# Altium PCB SML-230109PCB2.PcbDoc
Units mm, origin at the board's own origin, x right, y up, seen from the top; angles counter-clockwise.
Board outline 55 x 75 mm, 2 copper layers (Top Layer, Bottom Layer), stack 1.56 mm thick; 29 components, 21 nets, 98 pads, 190 vias.
Unrouted connection lines stored in the file: 175.
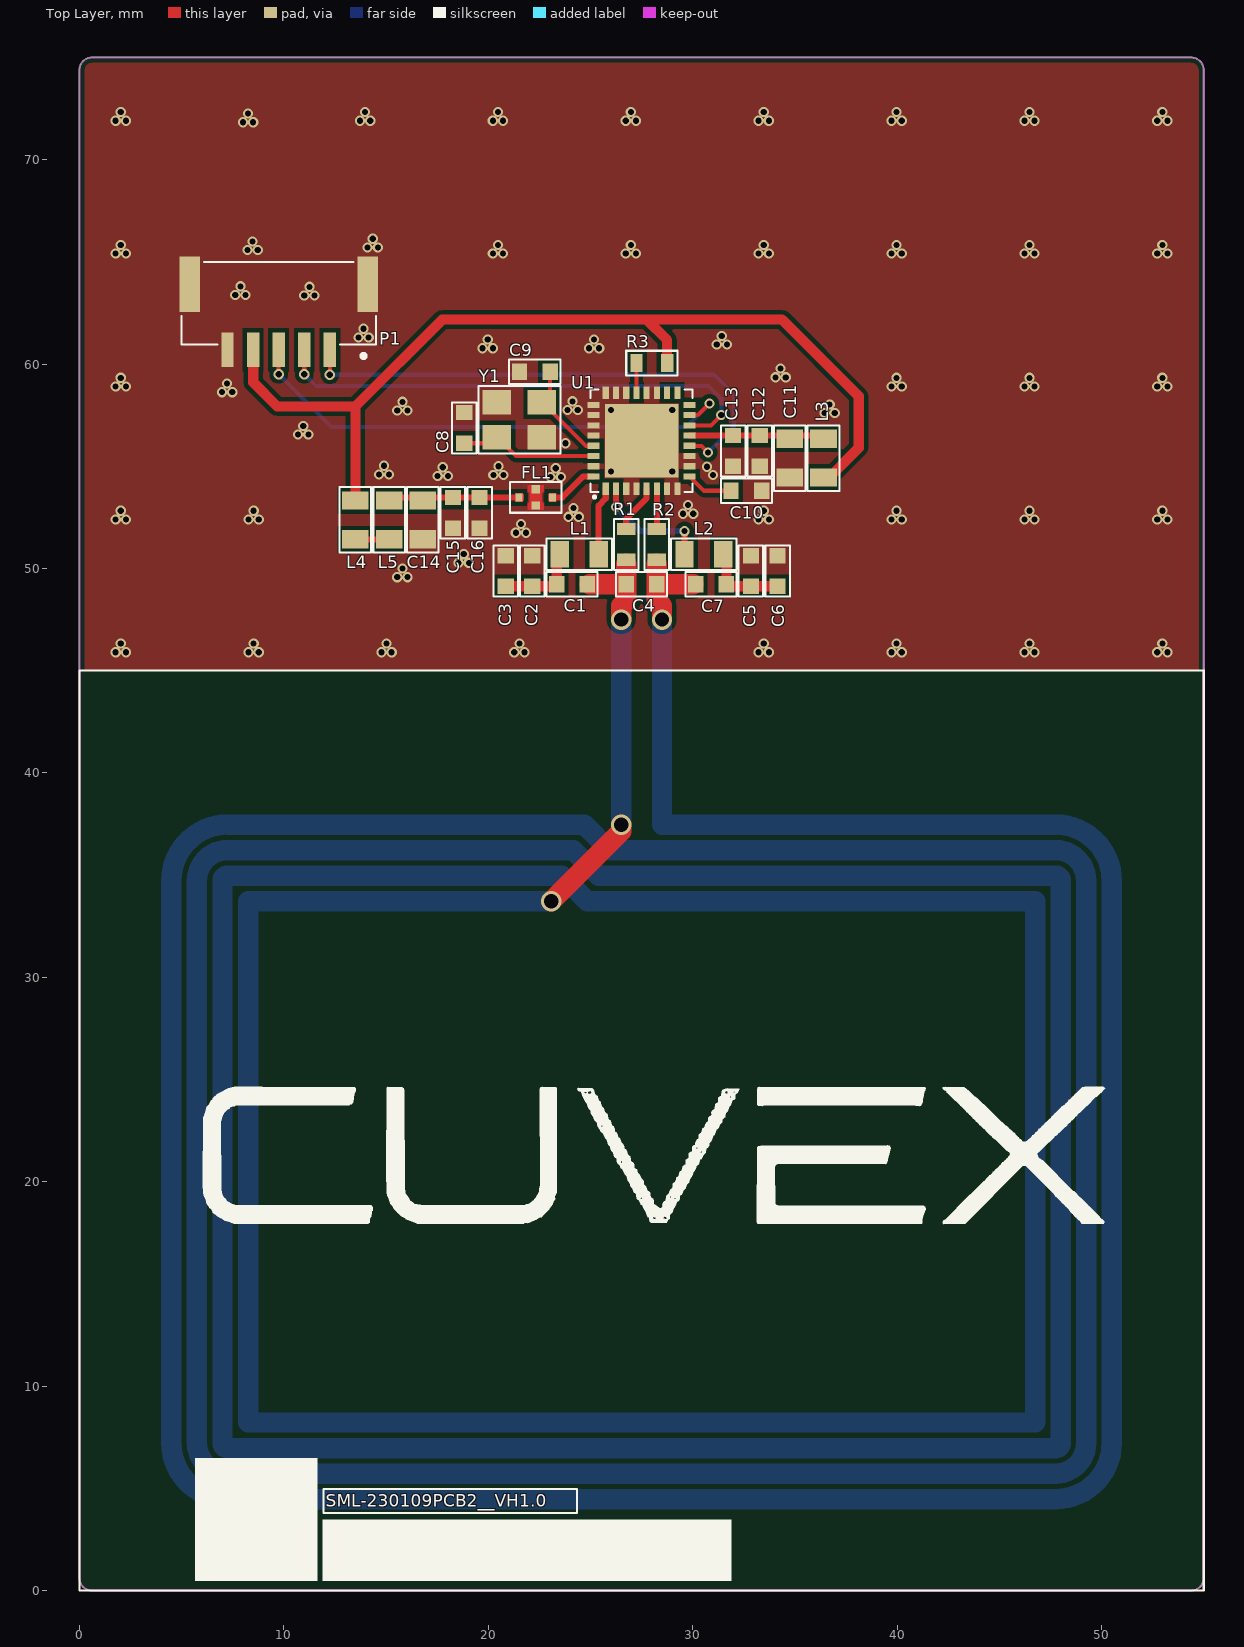
[diagram p0: Top Layer view]
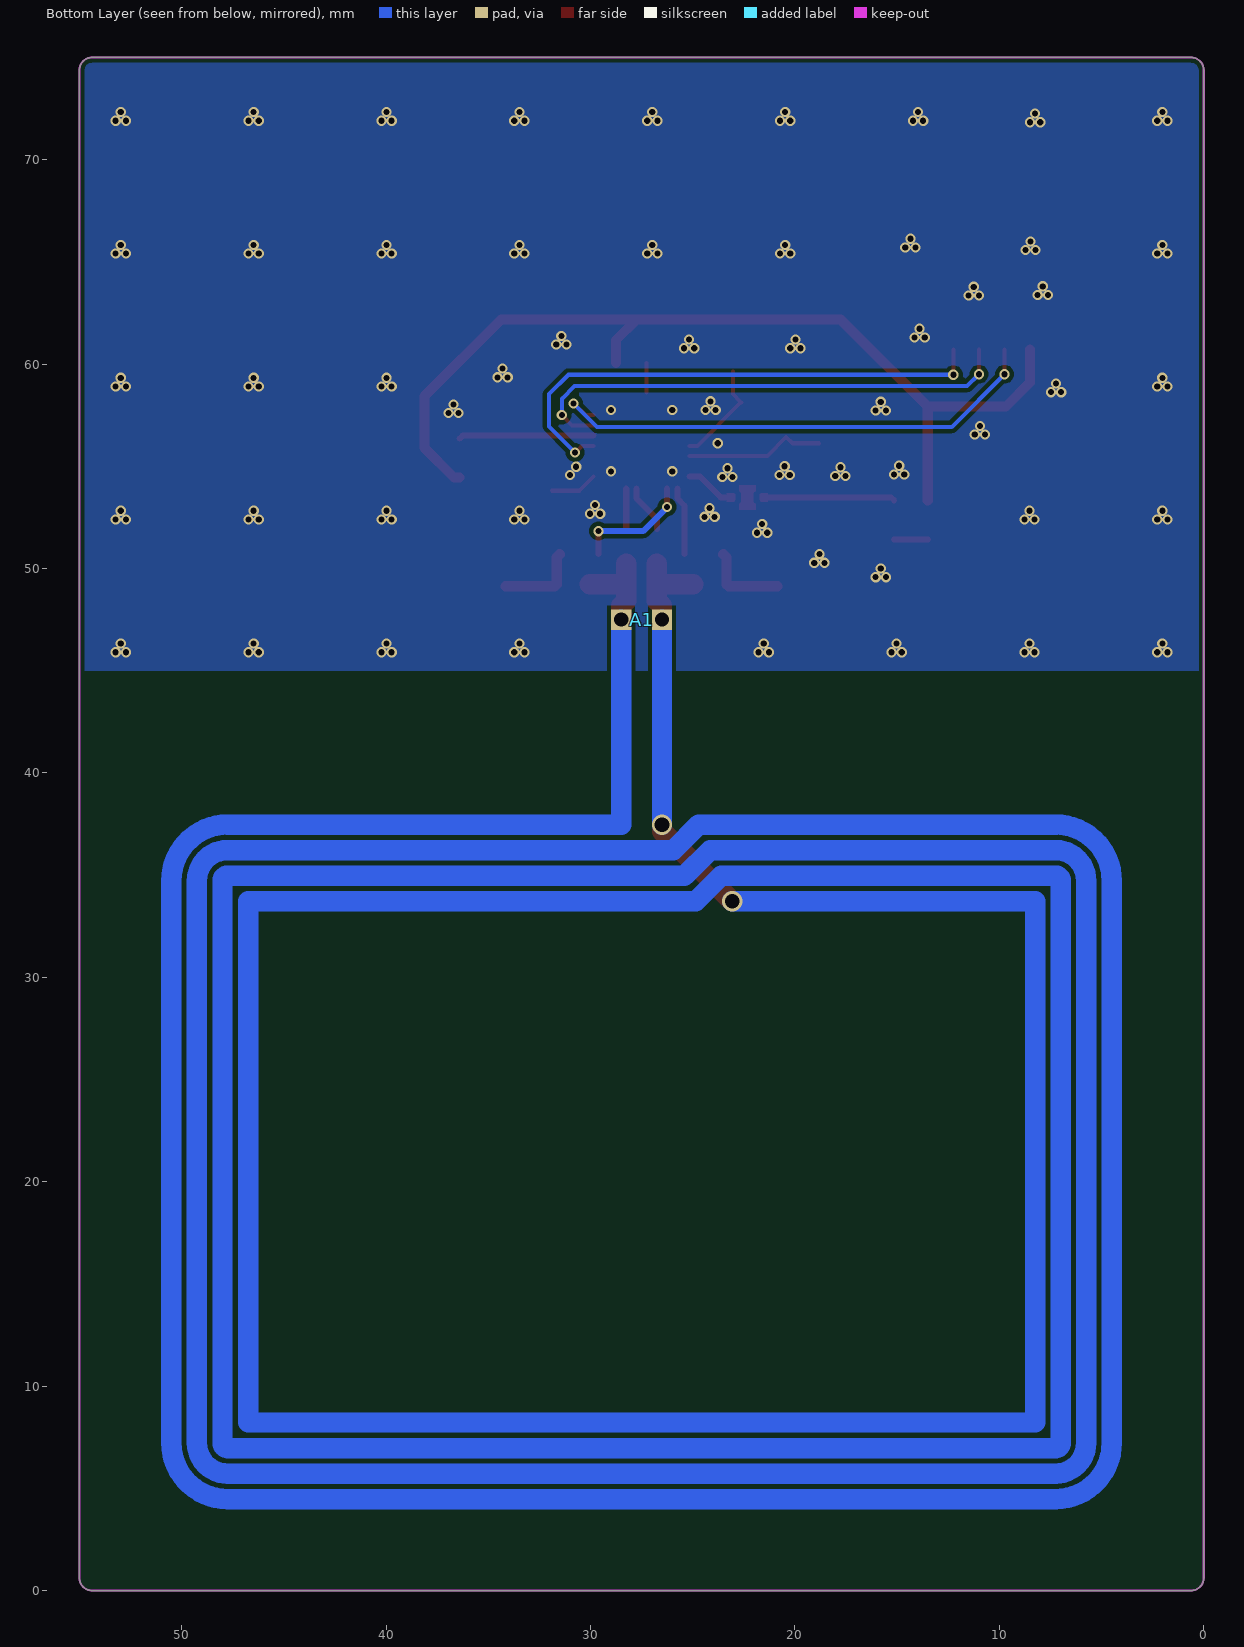
[diagram p1: Bottom Layer view, seen from below]
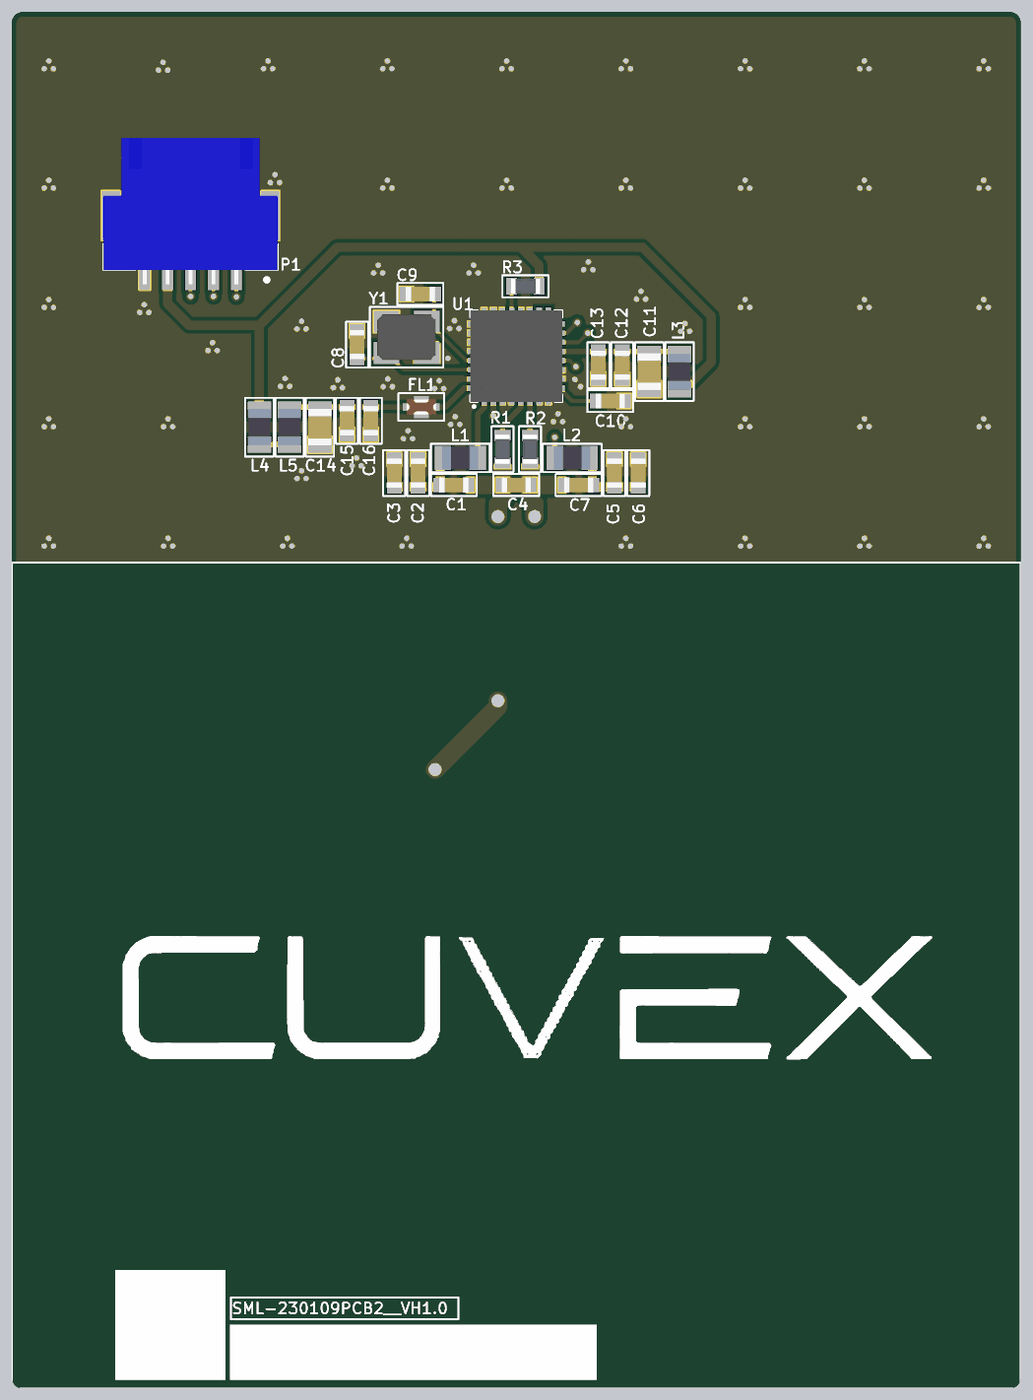
[diagram p2: 3D render of the assembled board from above, using the file's embedded part models]

## Layer stack, top to bottom
Top Solder: solder mask 0.02, SM-001, Dk 4
Top Layer: signal copper 0.035
Dielectric 1: core 1.49, Core-043, Dk 4.3
Bottom Layer: signal copper 0.035
Bottom Solder: solder mask 0.02, SM-001, Dk 4

## Board outline
0,0.625 0,74.375 cw(c0.625,74.375) 0.625,75 54.375,75 cw(c54.375,74.375) 55,74.375 55,0.625 cw(c54.375,0.625) 54.375,0 0.625,0 cw(c0.625,0.625)

## Design rules (kind name [scope] priority, off if disabled: settings)
Clearance [All] p1: gap=0.2 ignorepadtopadclearanceinfootprint=FALSE except(0: Arc-Hole Track-Hole SMDPad-Hole THPad-Hole Via-Hole Fill-Hole Poly-Hole Region-Hole Text-Hole)
ComponentClearance [All] p1: gap=0.05 collisioncheckmode=3 verticalgap=0.01 showdistances=FALSE
HoleToHoleClearance [All] p1: gap=0.15 allowstackedmicrovias=TRUE
MinimumSolderMaskSliver [All] p1: minsoldermaskwidth=0.04
PlaneClearance [All] p1: clearance=0.2
PlaneConnect [All] p1: planeconnectstyle=Direct reliefexpansion=0.508 reliefentries=4 reliefconductorwidth=0.254 reliefairgap=0.254
PolygonConnect [All] p1: connectstyle=Direct reliefconductorwidth=0.254 reliefentries=4 polygonreliefangle="90 Angle" airgapwidth=0.254
RoutingVias [All] p1: holewidth=0.3 width=0.5 viastyle="Through Hole" minholewidth=0.3 minwidth=0.5 maxholewidth=1 maxwidth=1.5
SilkToSilkClearance [All] p1: silktosilkclearance=0
SilkToSolderMaskClearance [IsPad] p1: minsilkscreentomaskgap=0.05 clearancetoexposedcopper=TRUE
SolderMaskExpansion [All] p1: expansion=0.102 istentingtop=FALSE
Width [All] p1: maxlimit=1 minlimit=0.2 preferedwidth=0.2
23 further rules are at their usual default settings.

## Components (designator, comment, footprint, x,y, rotation, side; value= is the part's Value field where it differs from the comment)
A1 "." ANT-PCB__NFC-MODEL-1 27.5,47.502 r180 bottom locked net-tie
C1 "." "[G] CAP-MLCC__0603" 24.1,49.225 r0 top locked value=47pF
C2 "." "[G] CAP-MLCC__0603" 22.15,49.875 r270 top locked value=100pF
C3 "." "[G] CAP-MLCC__0603" 20.85,49.875 r270 top locked value=100pF
C4 "." "[G] CAP-MLCC__0603" 27.5,49.227 r180 top locked value=82pF
C5 "." "[G] CAP-MLCC__0603" 32.85,49.875 r90 top locked value=100pF
C6 "." "[G] CAP-MLCC__0603" 34.15,49.875 r90 top locked value=100pF
C7 "." "[G] CAP-MLCC__0603" 30.9,49.225 r180 top locked value=47pF
C8 "." "[G] CAP-MLCC__0603" 18.825,56.875 r90 top locked value=10pF
C9 "." "[G] CAP-MLCC__0603" 22.275,59.625 r180 top locked value=10pF
C10 "." "[G] CAP-MLCC__0603" 32.625,53.8 r0 top locked value=1nF
C11 "." "[G] CAP-MLCC__0805" 34.75,55.4 r90 top locked value=1uF
C12 "." "[G] CAP-MLCC__0603" 33.275,55.75 r90 top locked value=100nF
C13 "." "[G] CAP-MLCC__0603" 31.975,55.75 r90 top locked value=10nF
C14 "." "[G] CAP-MLCC__0805" 16.8,52.375 r90 top locked value=1uF
C15 "." "[G] CAP-MLCC__0603" 18.275,52.725 r90 top locked value=100nF
C16 "." "[G] CAP-MLCC__0603" 19.575,52.725 r90 top locked value=10nF
FL1 "." EMIFIL-0603__NFM18PS 22.325,53.475 r0 top locked value=1uF
L1 "." "[G] IND__0805" 24.45,50.7 r180 top locked value=560nH
L2 "." "[G] IND__0805" 30.55,50.7 r0 top locked value=560nH
L3 "." "[G] IND__0805" 36.4,55.4 r90 top locked
L4 "." "[G] IND__0805" 13.5,52.375 r270 top locked
L5 "." "[G] IND__0805" 15.15,52.375 r90 top locked
P1 "." CONN-SMD__JST(5PIN)__SM05B-GHS-TB(LF)(SN) 9.75,62.3 r180 top locked
R1 "." "[G] RES-CHIP__0603" 26.75,51.175 r270 top locked value=330R
R2 "." "[G] RES-CHIP__0603" 28.25,51.175 r270 top locked value=330R
R3 "." "[G] RES-CHIP__0603" 28,60.05 r180 top locked value=10K
U1 "CR95HF-VMD5T" IC-NFC-RDR/WTR__CR95HF__VFQFPN32 27.5,56.25 r90 top locked
Y1 "." CRYSTAL__ABM8G 26.175,57.375 r0 top locked value="27.12 MHz"

## Footprints (in the part's own frame and the unit in brackets; to place one, negate y for a bottom-side part, rotate by r counter-clockwise, add the part's x,y. Pads: shape width x height; smd on the part's side, far side on the other; paste and mask are expansions set on the pad)
"[G] CAP-MLCC__0603" [mm] "Chip Capacitor, 2-Leads, Body 1.60x0.80mm"
  rect 0.75x0.8 smd mask+0.06: 1(-0.75,0) 2(0.75,0)
  silkscreen extent -1.25,-0.6 1.25,0.6, body extent -0.8,-0.41 0.8,0.41, height 0.82
"[G] CAP-MLCC__0805" [mm] "Chip Capacitor, 2-Leads, Body 2.00x1.25mm"
  rect 0.9x1.3 smd mask+0.06: 1(-0.95,0) 2(0.95,0)
  silkscreen extent -1.6,-0.77 1.6,0.77, body extent -1,-0.64 1,0.64, height 1.26
"[G] IND__0805" [mm] "Inductor, Body 2.00x1.25mm"
  rect 0.9x1.3 smd mask+0.06: 1(-0.95,0) 2(0.95,0)
  silkscreen extent -1.6,-0.77 1.6,0.78, body extent -1,-0.62 1,0.63, height 0.85
"[G] RES-CHIP__0603" [mm] "Chip Resistor, 2-Leads, Body 1.60x0.80mm"
  rect 0.6x0.9 smd mask+0.06: 1(-0.75,0) 2(0.75,0)
  silkscreen extent -1.25,-0.6 1.25,0.6, body extent -0.8,-0.4 0.8,0.4, height 0.45
ANT-PCB__NFC-MODEL-1 [mm] "Custom pcb antenna, NFC"
  rect 1x1 smd paste-99 mask+0.102: 1(-1,0) 2(1,0)
  Top Layer lines w1: 4.425,-13.778 19.25,-13.778 19.25,-39.278 -19.25,-39.278 -19.25,-13.778 2.65,-13.778 3.9,-12.528 20.25,-12.528 cw(c20.25,-12.778) 20.5,-12.778 20.5,-40.278 cw(c20.25,-40.278) 20.25,-40.528 -20.25,-40.528 cw(c-20.25,-40.278) -20.5,-40.278 -20.5,-12.778 cw(c-20.25,-12.778) -20.25,-12.528 2.1,-12.528 3.35,-11.278 20.25,-11.278 cw(c20.25,-12.778) 21.75,-12.778 21.75,-40.278 cw(c20.25,-40.278) 20.25,-41.778 -20.25,-41.778 cw(c-20.25,-40.278) -21.75,-40.278 -21.75,-12.778 cw(c-20.25,-12.778) -20.25,-11.278 1.55,-11.278 2.8,-10.028 20.25,-10.028 cw(c20.25,-12.778) 23,-12.778 23,-40.278 cw(c20.25,-40.278) 20.25,-43.028 -20.25,-43.028 cw(c-20.25,-40.278) -23,-40.278 -23,-12.778 cw(c-20.25,-12.778) -20.25,-10.028 -1,-10.028 -1,0 ; 1,-10.028 1,0
  Bottom Layer lines w1: 4.425,-13.778 1,-10.353 1,-10.028
CONN-SMD__JST(5PIN)__SM05B-GHS-TB(LF)(SN) [mm] "JST, 1x5 pin, side entry, matching connector \"GHR-05V-S\""
  rect 1x2.7 smd mask+0.06: 0(-4.35,-1.6) 0(4.35,-1.6)
  rect 0.6x1.7 smd mask+0.06: 1(-2.5,1.6) 2(-1.25,1.6) 3(0,1.6) 4(1.25,1.6) 5(2.5,1.6)
  silkscreen extent -4.75,-2.7 4.75,2, body extent -4.75,-5.82 4.75,2.15, height 4.35
CRYSTAL__ABM8G [mm] "SMD, 4-Leads, Body 3.2x2.5mm"
  rect 1.4x1.2 smd mask+0.06: 1(-5.75,-0.95) 2(-3.55,-0.95) 3(-3.55,0.75) 4(-5.75,0.75)
  silkscreen extent -6.65,-1.75 -2.65,1.55, body extent -6.25,-1.34 -3.05,1.14, height 0.99
EMIFIL-0603__NFM18PS [mm]
  rect 0.4x0.4 smd paste-1 mask+0: 0(0,-0.4) 0(0,0.4)
  rect 0.35x0.4 smd paste-1 mask+0: 1(-0.825,0) 2(0.825,0)
  Top Layer region: 0.3,-0.2 -0.3,-0.2 -0.3,0.2 0.3,0.2
  Top Layer region: 0.4,-0.3 0.4,-0.6 -0.4,-0.6 -0.4,-0.3 -0.3,-0.2 0.3,-0.2
  Top Layer region: 0.4,0.3 0.3,0.2 -0.3,0.2 -0.4,0.3 -0.4,0.6 0.4,0.6
  Top Layer region: 1,-0.2 0.65,-0.2 0.6,-0.15 0.6,0.15 0.65,0.2 1,0.2
  Top Layer region: -0.6,0.15 -0.6,-0.15 -0.65,-0.2 -1,-0.2 -1,0.2 -0.65,0.2
  silkscreen extent -1.25,-0.75 1.25,0.75, body extent -0.8,-0.4 0.8,0.4, height 0.7
IC-NFC-RDR/WTR__CR95HF__VFQFPN32 [mm]
  rect 3.6x3.6 smd paste-0.5 mask+0.06: 0(0,0)
  rect 0.6x0.3 smd mask+0.06: 1(-2.35,1.75) 2(-2.35,1.25) 3(-2.35,0.75) 4(-2.35,0.25) 5(-2.35,-0.25) 6(-2.35,-0.75) 7(-2.35,-1.25) 8(-2.35,-1.75) 17(2.35,-1.75) 18(2.35,-1.25) 19(2.35,-0.75) 20(2.35,-0.25) 21(2.35,0.25) 22(2.35,0.75) 23(2.35,1.25) 24(2.35,1.75)
  rect 0.3x0.6 smd mask+0.06: 9(-1.75,-2.35) 10(-1.25,-2.35) 11(-0.75,-2.35) 12(-0.25,-2.35) 13(0.25,-2.35) 14(0.75,-2.35) 15(1.25,-2.35) 16(1.75,-2.35) 25(1.75,2.35) 26(1.25,2.35) 27(0.75,2.35) 28(0.25,2.35) 29(-0.25,2.35) 30(-0.75,2.35) 31(-1.25,2.35) 32(-1.75,2.35)
  silkscreen extent -2.77,-2.5 2.5,2.5, body extent -2.5,-2.5 2.5,2.5, height 0.92

## Part data
A1: library part ANT-PCB__NFC-MODEL-1, "ANTENNA PCB, NFC, model 1", [06] - Package=55x45mm, [00] - Description (BOM)="ANTENNA PCB, NFC, model 1"
C1 C2 C3 C4 C5 C6 C7 C8 C9 C10 C12 C13 C15 C16: library part CAP_MLCC_0603, "CAP MLCC 0603", [04] - Power features=010, [06] - Package=0603, Voltage=010
  C1 C7: [00] - Description (BOM)="CAP MLCC 47pF 0603 010", STAR Code=C47pF0603010
  C2 C3 C5 C6: [00] - Description (BOM)="CAP MLCC 100pF 0603 010", STAR Code=C100pF0603010
  C4: [00] - Description (BOM)="CAP MLCC 82pF 0603 010", STAR Code=C82pF0603010
  C8 C9: [00] - Description (BOM)="CAP MLCC 10pF 0603 010", STAR Code=C10pF0603010
  C10: [00] - Description (BOM)="CAP MLCC 1nF 0603 010", STAR Code=C1nF0603010
  C12 C15: [00] - Description (BOM)="CAP MLCC 100nF 0603 010", STAR Code=C100nF0603010
  C13 C16: [00] - Description (BOM)="CAP MLCC 10nF 0603 010", STAR Code=C10nF0603010
C11 C14: library part CAP_MLCC_0805, "CAP MLCC 0805", [04] - Power features=010, [06] - Package=0805, [00] - Description (BOM)="CAP MLCC 1uF 0805 010", STAR Code=C1uF0805010, Voltage=010
FL1: library part NFM18PS105R0J3D, "EMIFIL 0603, Murata, NFM18PS, 1uF, 6'3V, 2A", [02] - Manufacturer=Murata, [04] - Power features="6'3V, 2A", [05] - Temperature range="-55 to +105 ºC", [06] - Package="NFM18PS (0603)", [00] - Description (BOM)="EMIFIL 0603, Murata, NFM18PS, 1uF, 6'3V, 2A", [01] - MPN Code=NFM18PS105R0J3D, [03] - Datasheet=https://www.mouser.es/datasheet/2/281/1/NFM18PS105R0J3_01-1989791.pdf
L1 L2: library part IND_SMD_0805, "IND SMD 0805 [G]", [01] - MPN Code=LQM21NNR56K10D, [06] - Package=0805, [00] - Description (BOM)="IND 560nH 0805"
L3 L4: library part IND_SMD_0805, "IND SMD 0805 [G]", [01] - MPN Code=742792042, [06] - Package=0805, [00] - Description (BOM)="IND * 0805"
L5: library part IND_SMD_0805, "IND SMD 0805 [G]", [01] - MPN Code=742792093, [06] - Package=0805, [00] - Description (BOM)="IND * 0805"
P1: library part SM05B-GHS-TB(LF)(SN), "CONN SMD, JST, side entry, 1x5pin, with lock, 1A, 50V", [02] - Manufacturer=JST, [04] - Power features="1A (AC/DC), 50V (AC/DC)", [05] - Temperature range="-25 to +85 ºC", [06] - Package="1x5pin, pitch=1'25mm", [00] - Description (BOM)="CONN SMD, JST, side entry, 1x5pin, with lock, 1A, 50V", [01] - MPN Code=SM05B-GHS-TB(LF)(SN), [03] - Datasheet=https://www.jst-mfg.com/product/pdf/eng/eGH.pdf, Matching connector=GHR-05V-S
R1 R2 R3: library part RES_SMD_0603, "RES SMD 0603 [G]", [04] - Power features=100mW, [06] - Package=0603, Tolerance=1%
  R1 R2: [00] - Description (BOM)="RES 330R OHM 0603 1% 1/10W", STAR Code=330R06031%
  R3: [00] - Description (BOM)="RES 10K OHM 0603 1% 1/10W", STAR Code=10K06031%
U1: "IC NFC READER/WRITER, SPI/UART, 13'56 MHz, Vdd=2'7-3'3V", [02] - Manufacturer="ST Microelectronics", [04] - Power features=Vdd=2'7-3'3V, [05] - Temperature range="-25 to +85 ºC", [06] - Package=VFQFPN-32, [00] - Description (BOM)="IC NFC READER/WRITER, SPI/UART, 13'56 MHz, Vdd=2'7-3'3V", [01] - MPN Code=CR95HF-VMD5T, [03] - Datasheet=https://www.mouser.es/datasheet/2/389/cr95hf-1848964.pdf
Y1: library part ABM8G-27.120MHZ-10-D1-T, "CRYSTAL, 27.1200MHz, ±10ppm, CL=10pF, CS=5pF", [02] - Manufacturer="Abracon LLC", [05] - Temperature range="-40 to +85 ºC", [06] - Package="ABM8G (3.2 x 2.5mm)", [00] - Description (BOM)="CRYSTAL, 27.1200MHz, ±10ppm, CL=10pF, CS=5pF", [01] - MPN Code=ABM8G-27.120MHZ-10-D1-T, [03] - Datasheet=https://www.mouser.es/datasheet/2/3/ABM8G-1608872.pdf

## Via types
v1: diameter 0.5, hole 0.3, Top Layer to Bottom Layer, tented both sides, 186 vias
v2: diameter 1, hole 0.711, Top Layer to Bottom Layer, tented both sides, 2 vias
v3: diameter 1, hole 0.7, Top Layer to Bottom Layer, tented both sides, 2 vias

## Nets (pads, with @x,y where several pads share a name; then routed paths per layer and width w, separated by ;. In a path a pad name is that pad's centre, name@x,y a point inside that pad or via, vN(x,y) a via of type N, cw(c..) or ccw(c..) an arc to the next point about the centre after c; other vN are vias at no path point)
+3V3: L3.1 L4.1 P1.4 R3.1 | length 47
  Top Layer w0.5: P1.4 8.5,59.1 9.675,57.925 13.5,57.925 ; L4.1 13.5,57.925 ; R3.1 28.75,61.175 27.75,62.175 ; L3.1 36.675,54.45 38.125,55.9 38.125,58.425 34.375,62.175 27.75,62.175 ; 13.5,57.925 17.75,62.175 27.75,62.175
GND: C2.1 C3.1 C5.2 C6.2 C8.2 C9.2 C10.2 C11.1 C12.1 C13.1 C14.1 C15.1 C16.1 FL1.0 P1.0 P1.5 U1.0 U1.3 U1.4 U1.7 U1.8 U1.10 U1.11 U1.19 U1.20 U1.22 U1.23 U1.24 U1.25 U1.26 U1.27 U1.28 U1.31 Y1.2 Y1.4
  other v1: 1.775,45.9 2.275,45.9 8.275,45.9 8.775,45.9 14.775,45.9 15.275,45.9 21.275,45.9 21.775,45.9 33.225,45.9 33.725,45.9 39.725,45.9 40.225,45.9 46.225,45.9 46.725,45.9 52.725,45.9 53.225,45.9 2.025,46.325 8.525,46.325 15.025,46.325 21.525,46.325 33.475,46.325 39.975,46.325 46.475,46.325 52.975,46.325 15.55,49.575 16.05,49.575 15.8,50 18.55,50.275 19.05,50.275 18.8,50.7 21.35,51.75 21.85,51.75 21.6,52.175 1.775,52.4 2.275,52.4 8.275,52.4 8.775,52.4 33.225,52.4 33.725,52.4 39.725,52.4 40.225,52.4 46.225,52.4 46.725,52.4 52.725,52.4 53.225,52.4 23.925,52.525 24.425,52.525 29.525,52.675 30.025,52.675 2.025,52.825 8.525,52.825 33.475,52.825 39.975,52.825 46.475,52.825 52.975,52.825 24.175,52.95 29.775,53.1 23.05,54.475 23.55,54.475 17.525,54.525 18.025,54.525 20.25,54.575 20.75,54.575 31,54.575 14.65,54.6 15.15,54.6 26,54.75 29,54.75 23.3,54.9 17.775,54.95 30.7,54.975 20.5,55 14.9,55.025 23.775,56.125 10.7,56.55 11.2,56.55 10.95,56.975 36.45,57.6 36.95,57.6 15.55,57.725 16.05,57.725 23.875,57.75 24.375,57.75 26,57.75 29,57.75 36.7,58.025 15.8,58.15 24.125,58.175 6.975,58.625 7.475,58.625 1.775,58.9 2.275,58.9 39.725,58.9 40.225,58.9 46.225,58.9 46.725,58.9 52.725,58.9 53.225,58.9 7.225,59.05 2.025,59.325 39.975,59.325 46.475,59.325 52.975,59.325 34.05,59.35 34.55,59.35 34.3,59.775 19.725,60.775 20.225,60.775 24.925,60.775 25.425,60.775 31.175,60.95 31.675,60.95 19.975,61.2 25.175,61.2 13.65,61.3 14.15,61.3 31.425,61.375 13.9,61.725 11,63.35 11.5,63.35 7.625,63.375 8.125,63.375 11.25,63.775 7.875,63.8 1.775,65.4 2.275,65.4 20.225,65.4 20.725,65.4 26.725,65.4 27.225,65.4 33.225,65.4 33.725,65.4 39.725,65.4 40.225,65.4 46.225,65.4 46.725,65.4 52.725,65.4 53.225,65.4 8.225,65.575 8.725,65.575 14.1,65.7 14.6,65.7 2.025,65.825 20.475,65.825 26.975,65.825 33.475,65.825 39.975,65.825 46.475,65.825 52.975,65.825 8.475,66 14.35,66.125 8,71.825 8.5,71.825 1.775,71.9 2.275,71.9 13.725,71.9 14.225,71.9 20.225,71.9 20.725,71.9 26.725,71.9 27.225,71.9 33.225,71.9 33.725,71.9 39.725,71.9 40.225,71.9 46.225,71.9 46.725,71.9 52.725,71.9 53.225,71.9 8.25,72.25 2.025,72.325 13.975,72.325 20.475,72.325 26.975,72.325 33.475,72.325 39.975,72.325 46.475,72.325 52.975,72.325
MCU_SPI_NSS: P1.3 U1.15 | length 25
  Top Layer w0.2: v1(9.75,59.5) P1.3 ; U1.15 30.25,57.5 30.8,58.05 v1(30.825,58.075)
  Bottom Layer w0.2: v1(9.75,59.5) 12.325,56.925 29.675,56.925 v1(30.825,58.075)
MCU_UART_RX: P1.2 U1.14 | length 24.7
  Top Layer w0.2: v1(11,59.5) P1.2 ; U1.14 30.9,57 v1(31.4,57.5)
  Bottom Layer w0.2: v1(11,59.5) 11.575,58.925 30.775,58.925 31.4,58.3 v1(31.4,57.5)
MCU_UART_TX: P1.1 U1.12 | length 25.8
  Top Layer w0.2: v1(12.25,59.475) P1.1 ; U1.12 30.425,56 v1(30.75,55.675)
  Bottom Layer w0.2: v1(12.25,59.475) 31.075,59.475 32.025,58.525 32.025,56.95 v1(30.75,55.675)
NetC1_1: C1.1 C2.2 C3.2 L1.2 | length 4.1
  Top Layer w0.5: C3.2@20.85,49.125 23.25,49.125 C1.1 23.35,50.55 L1.2
NetC5_1: C5.1 C6.1 C7.1 L2.2 | length 4.1
  Top Layer w0.5: L2.2 31.65,50.55 C7.1 31.75,49.125 32.95,49.125 C6.1
NetC10_1: C10.1 U1.9 | length 2.3
  Top Layer w0.2: U1.9 30.55,53.8 C10.1
NetC11_2: C11.2 C12.2 C13.2 L3.2 U1.13 | length 6.6
  Top Layer w0.3: U1.13 C13.2 C12.2 36.25,56.5 L3.2
NetC14_2: C14.2 C15.2 C16.2 FL1.1 L5.2 | length 6.4
  Top Layer w0.3: L5.2 15.3,53.475 17.075,53.475 C15.2 19.887,53.475 FL1.1
NetFL1_2: FL1.2 U1.32 | length 2.4
  Top Layer w0.3: FL1.2 23.625,53.475 24.65,54.5 U1.32
NetL1_1: L1.1 U1.1 | length 3.3
  Top Layer w0.3: L1.1 25.4,53.075 25.75,53.425 U1.1
NetL2_1: L2.1 U1.2 | length 5.9
  Top Layer w0.3: v1(26.25,53) U1.2 ; L2.1 v1(29.6,51.825)
  Bottom Layer w0.3: v1(26.25,53) 27.425,51.825 v1(29.6,51.825)
NetL4_2: L4.2 L5.1 | length 1.6
  Top Layer w0.3: L4.2 L5.1
NetR1_1: R1.1 U1.5 | length 2.4
  Top Layer w0.3: R1.1 26.75,52.425 27.75,53.425 U1.5
NetR2_1: R2.1 U1.6 | length 2
  Top Layer w0.3: R2.1 U1.6
NetR3_2: R3.2 U1.21 | length 1.5
  Top Layer w0.2: U1.21 R3.2
NFC_1: A1.1 C4.1 C7.2 R2.2 | length 4.6
  Top Layer w1: R2.2@28.25,50.227 C4.1 ; v3(28.5,47.502) 28.5,48.177 28.25,48.427 28.25,48.827 C4.1 ; C7.2@30.025,49.227 C4.1
NFC_2: A1.2 C1.2 C4.2 R1.2 | length 4.6
  Top Layer w1: C1.2@24.975,49.227 C4.2 ; v3(26.5,47.502) 26.5,48.177 26.75,48.427 26.75,48.827 C4.2 ; R1.2@26.75,50.227 C4.2
XIN: C9.1 U1.29 Y1.3 | length 5.1
  Top Layer w0.2: C9.1 23.025,58.525 Y1.3 22.65,58.125 24.775,56 U1.29
XOUT: C8.1 U1.30 Y1.1 | length 6.8
  Top Layer w0.2: C8.1 20.125,56.125 Y1.1 21.35,55.5 U1.30
pads on no net: U1.16 U1.17 U1.18
copper on no net:
  other v2: 23.075,33.724 26.5,37.474

## Polygon pours and split planes (outlines as drawn)
GND on Bottom Layer "NONET_L-01_P-001" (solid, remove dead copper, pour order 1): 0,45 0,74.375 cw(c0.625,74.375) 0.625,75 54.375,75 cw(c54.375,74.375) 55,74.375 55,45
GND on Top Layer "NONET_L-01_P-001" (solid, remove dead copper, pour order 0): 0,45 0,74.375 cw(c0.625,74.375) 0.625,75 54.375,75 cw(c54.375,74.375) 55,74.375 55,45

## Keep-outs
Keep-Out Layer:
  the board outline again, w0.1

## Silkscreen, mask and mechanical layers (free items; w line width, h text height)
Top Overlay:
  drawing of 12 lines, arcs and shapes, not listed
  text "SML-230109PCB2__VH1.0" at 12.063,4.091 h0.6